# EAGLE board Blank M2 Shield (EAGLE 6.2)

Size 75.95 x 23.32 mm. Coordinates in mm from the lower left corner, seen from the top.
Outline: 0,0 75.95,0 75.95,23.32 0,23.32 0,0
Copper layers (1*16): Top 0.035mm / dielectric 1.5mm / Bottom 0.035mm
Design rules: minimum track width 10mil, minimum drill 24mil, track to track 8mil, track to pad 8mil, pad to pad 8mil, via to via 8mil, smd to smd 8mil, copper to edge 40mil, drill to drill 8mil, minimum pad ring 10mil, minimum via ring 8mil, stop-mask expansion 4mil, vias tented up to drill 0mil, thermal gap 10mil

## Footprints (pad centres in the part's own frame; a part is rotated, then mirrored left to right if it is on the bottom)
1X01NS = drill 1.016 pad 1.88: 1 0,0
2X8 = drill 1.016 pad 1.88 octagon: 1 0,0; 2 0,2.54; 3 2.54,0; 4 2.54,2.54; 5 5.08,0; 6 5.08,2.54; 7 7.62,0; 8 7.62,2.54; 9 10.16,0; 10 10.16,2.54; 11 12.7,0; 12 12.7,2.54; 13 15.24,0; 14 15.24,2.54; 15 17.78,0; 16 17.78,2.54
2X10 = drill 1.016 pad 1.88 octagon: 1 -11.43,-1.27; 2 -11.43,1.27; 3 -8.89,-1.27; 4 -8.89,1.27; 5 -6.35,-1.27; 6 -6.35,1.27; 7 -3.81,-1.27; 8 -3.81,1.27; 9 -1.27,-1.27; 10 -1.27,1.27; 11 1.27,-1.27; 12 1.27,1.27; 13 3.81,-1.27; 14 3.81,1.27; 15 6.35,-1.27; 16 6.35,1.27; 17 8.89,-1.27; 18 8.89,1.27; 19 11.43,-1.27; 20 11.43,1.27

## Placement (x,y rotation side)
JP1  M01SMDNS  [1X01NS]  22.81,10.49 0 top
JP2  M01SMDNS  [1X01NS]  25.3,10.49 0 top
U$1  M08X2  [2X8]  2.54,18.1 0 top
U$2  M08X2  [2X8]  2.54,10.48 0 top
U$3  M08X2  [2X8]  2.54,2.86 0 top
U$4  M10X2  [2X10]  59.69,19.37 0 top
U$5  M10X2  [2X10]  59.69,4.13 0 top

## Library data of the parts
JP1 JP2 U$1-U$5 = SparkFun